# Altium PCB PCI short card universal - 32 BIT.PCBDOC
Units mil, origin at the board's own origin, x right, y up, seen from the top; angles counter-clockwise.
Board outline 6875 x 4200 mil, 10 copper layers (TopLayer, MidLayer1, MidLayer2, MidLayer3, MidLayer4, MidLayer5, MidLayer6, MidLayer7, MidLayer8, BottomLayer); 1 components, 0 nets, 12 pads, 0 vias.
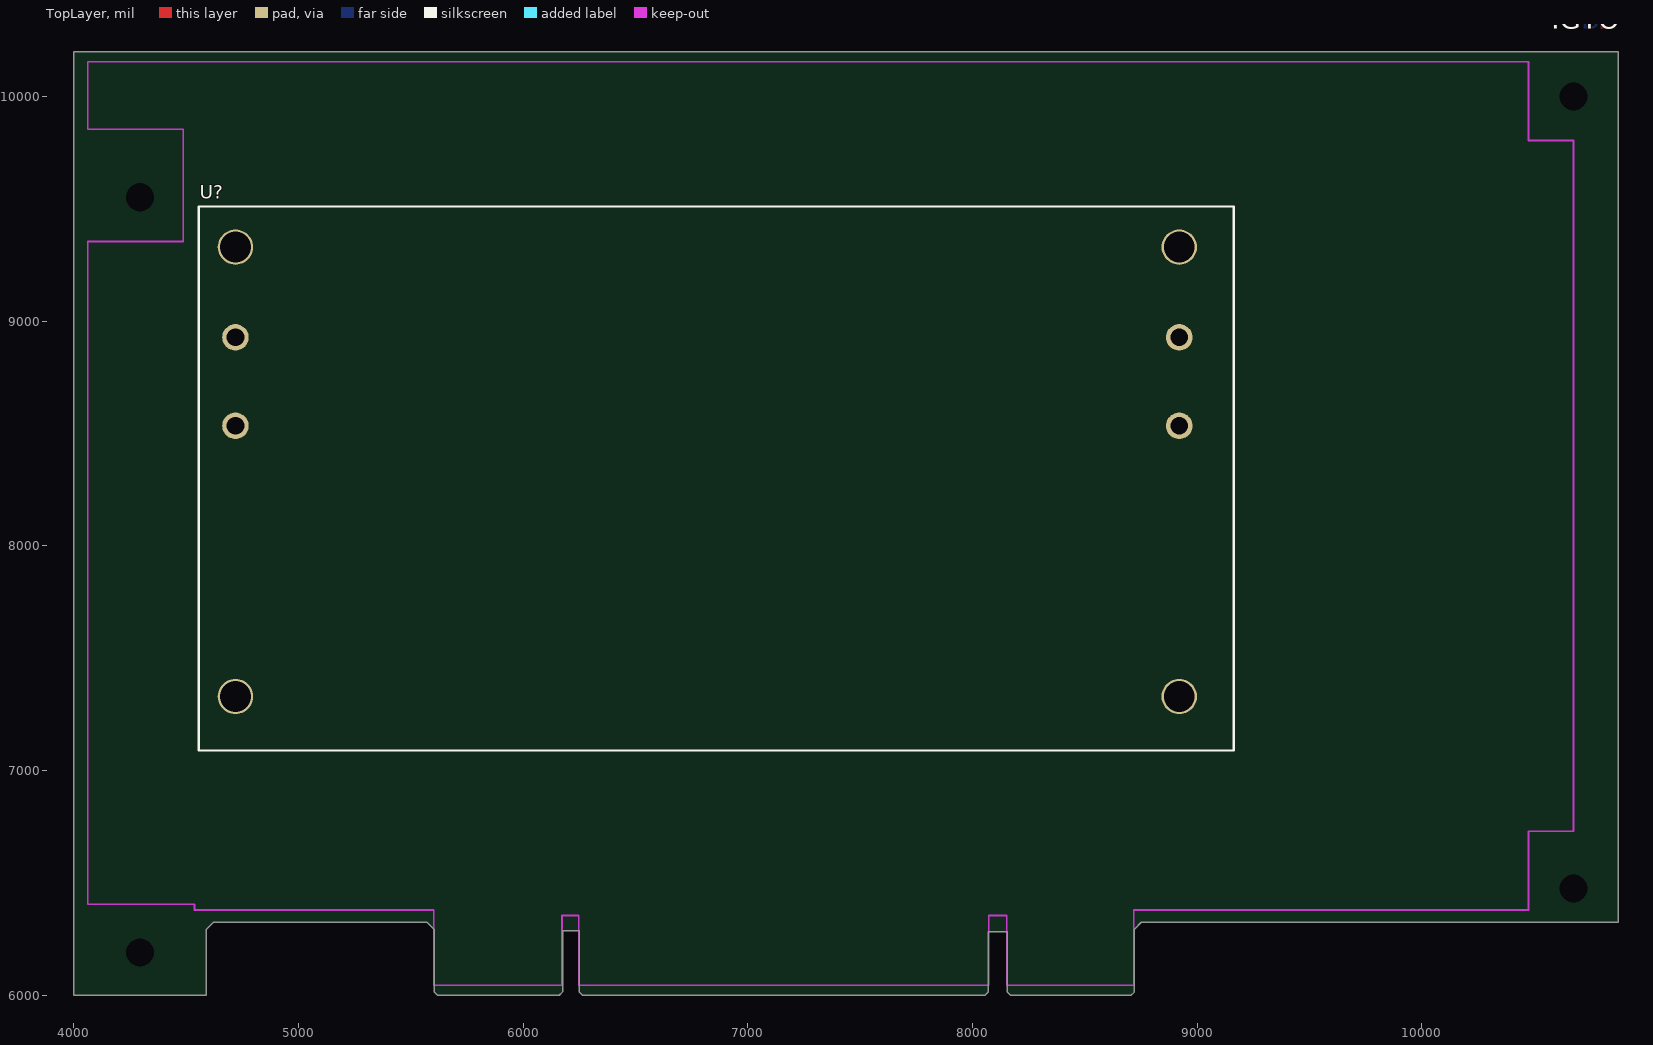
[diagram p0: TopLayer view]
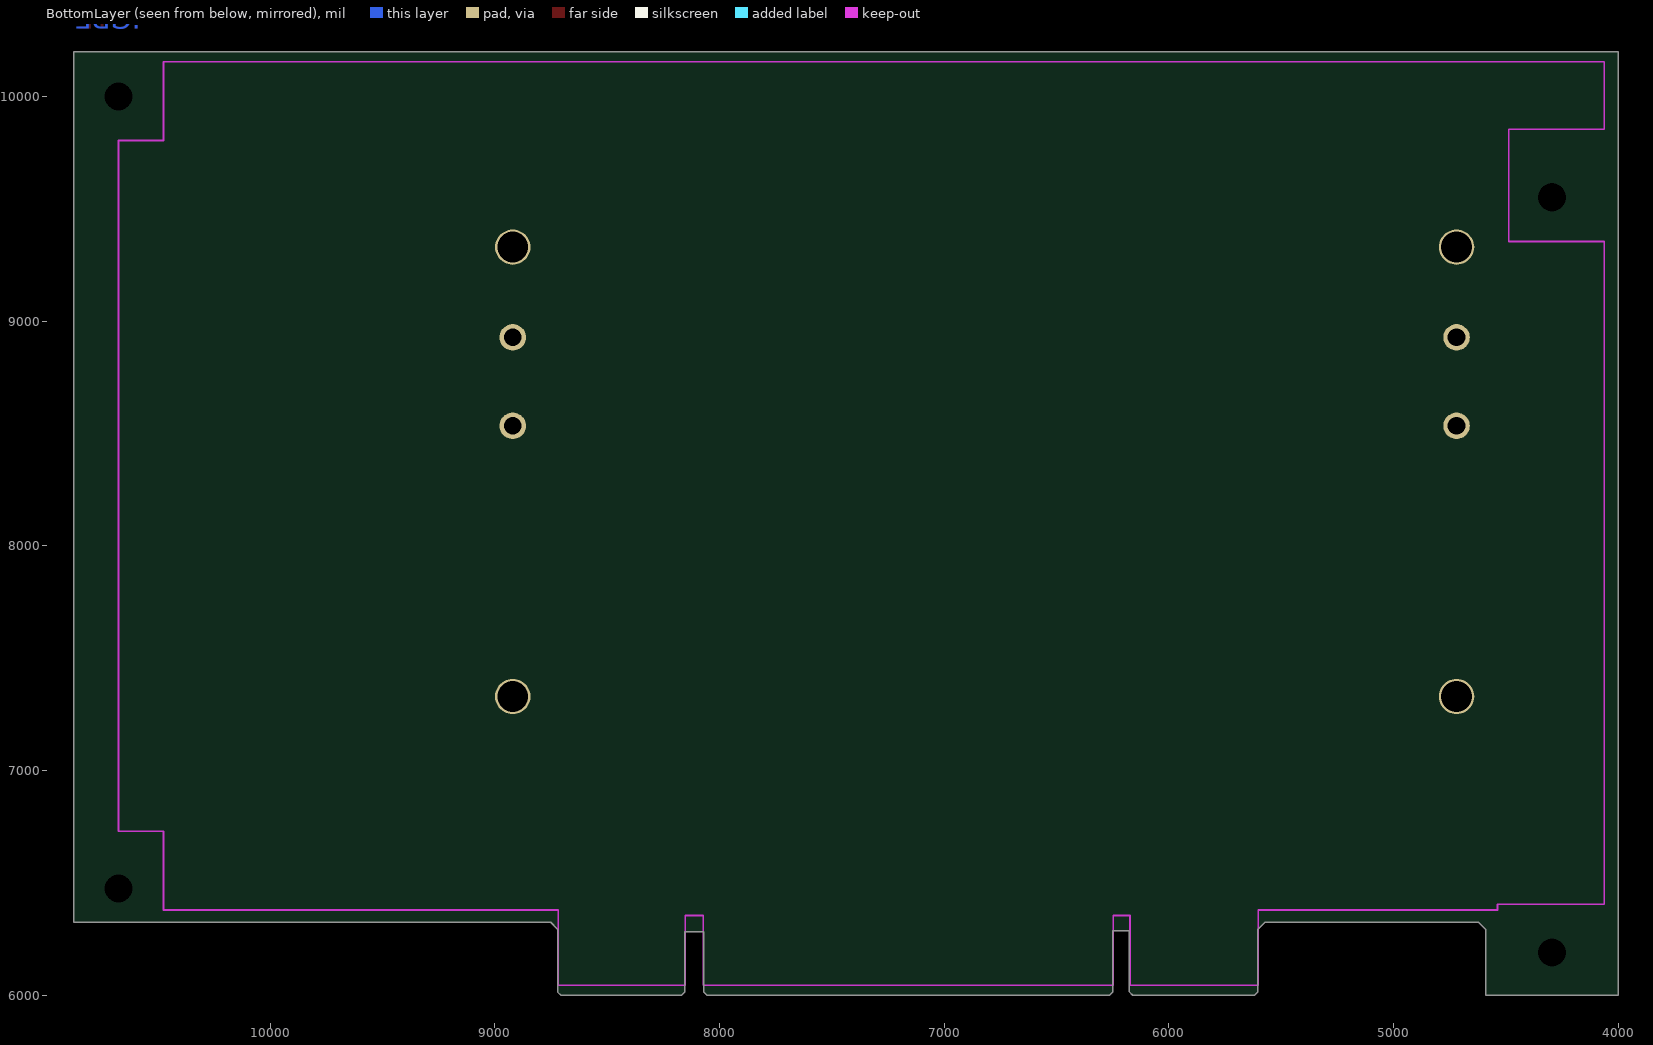
[diagram p1: BottomLayer view, seen from below]
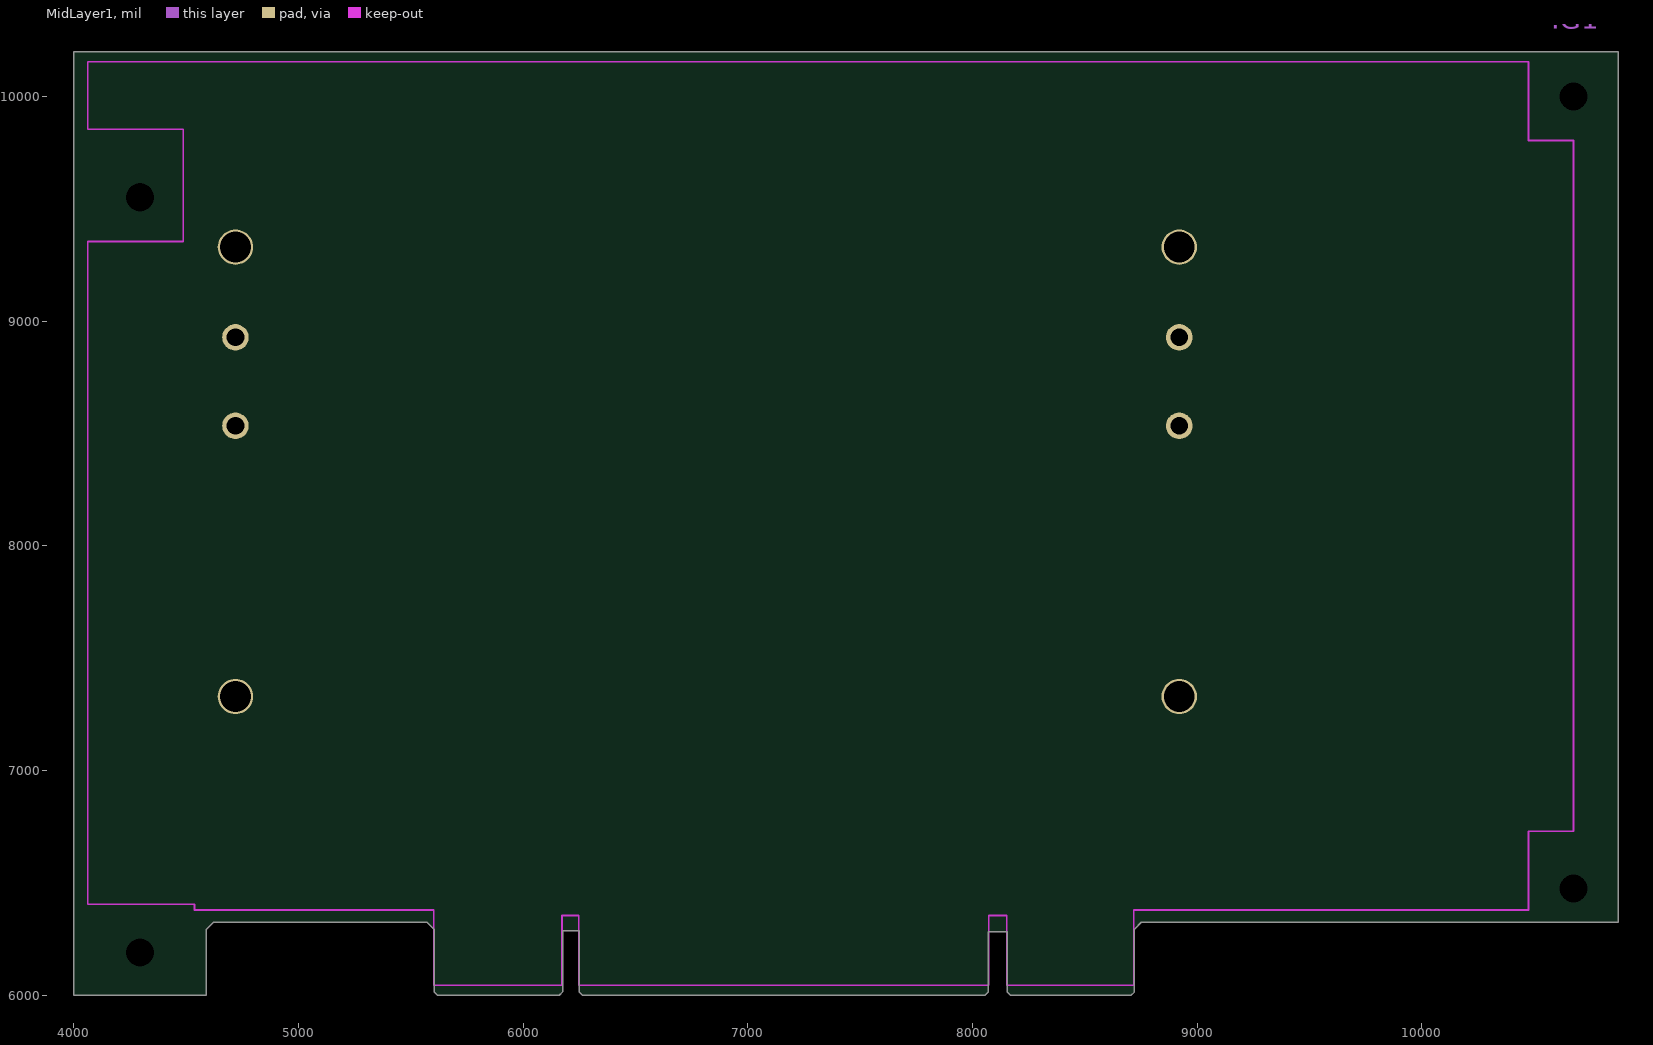
[diagram p2: MidLayer1]
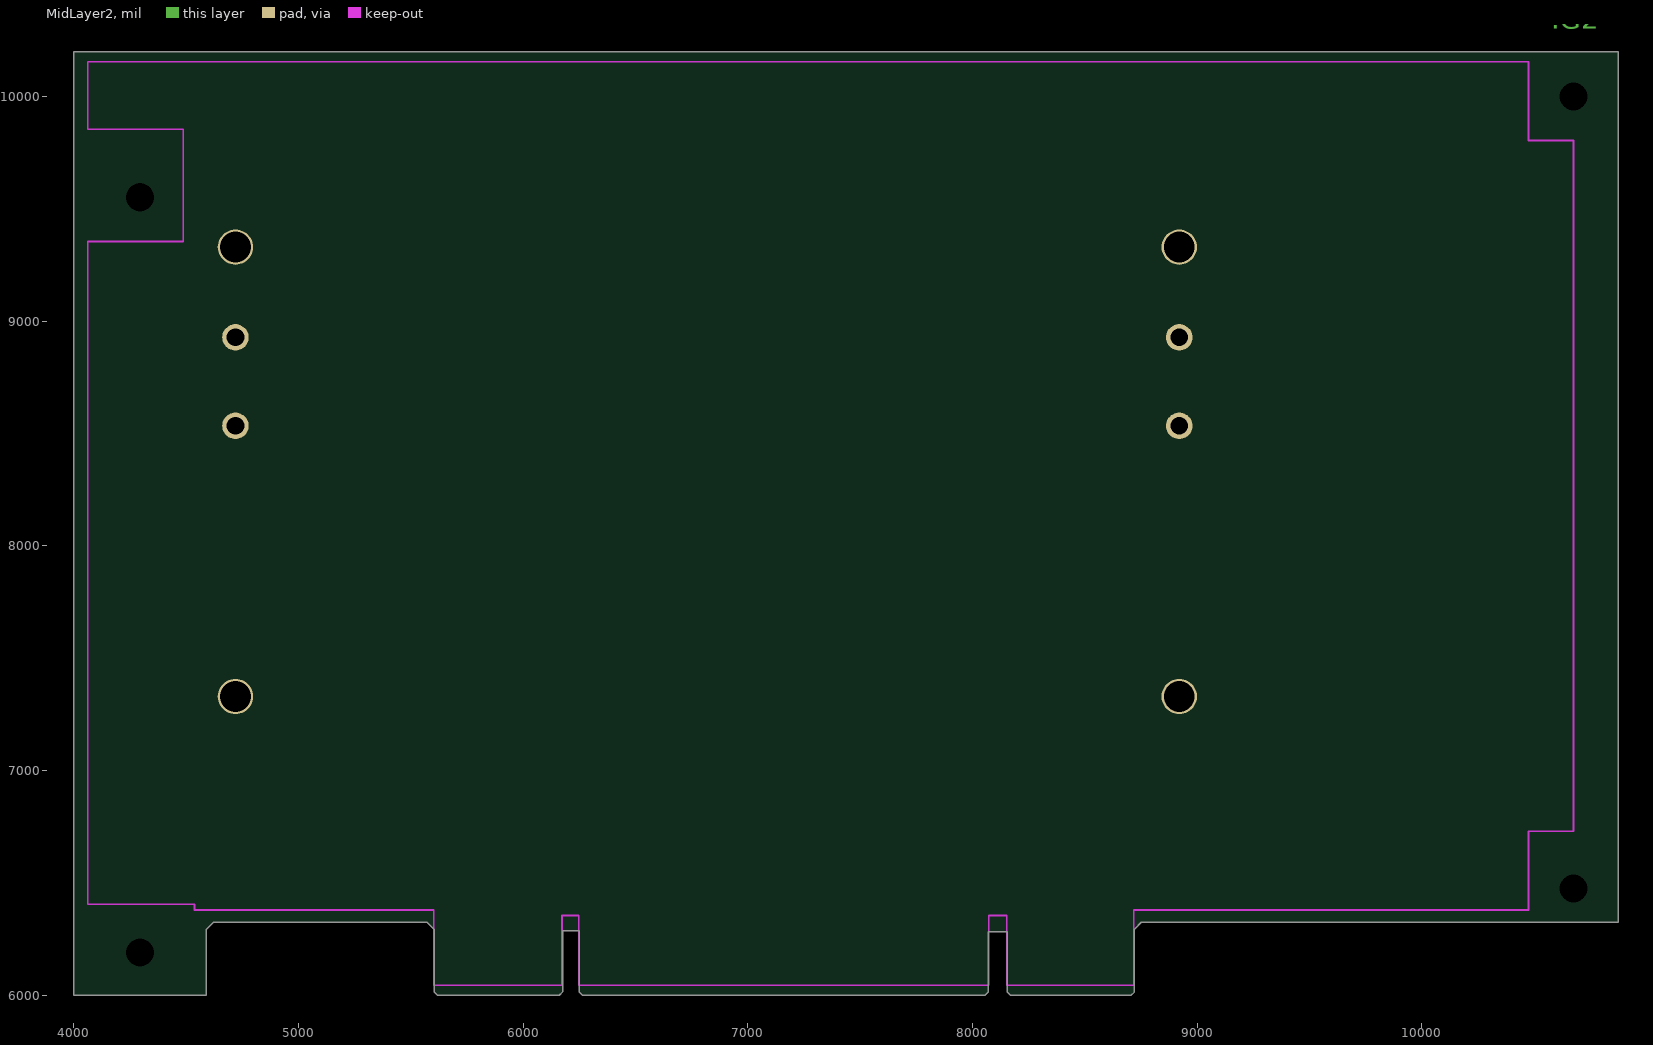
[diagram p3: MidLayer2]
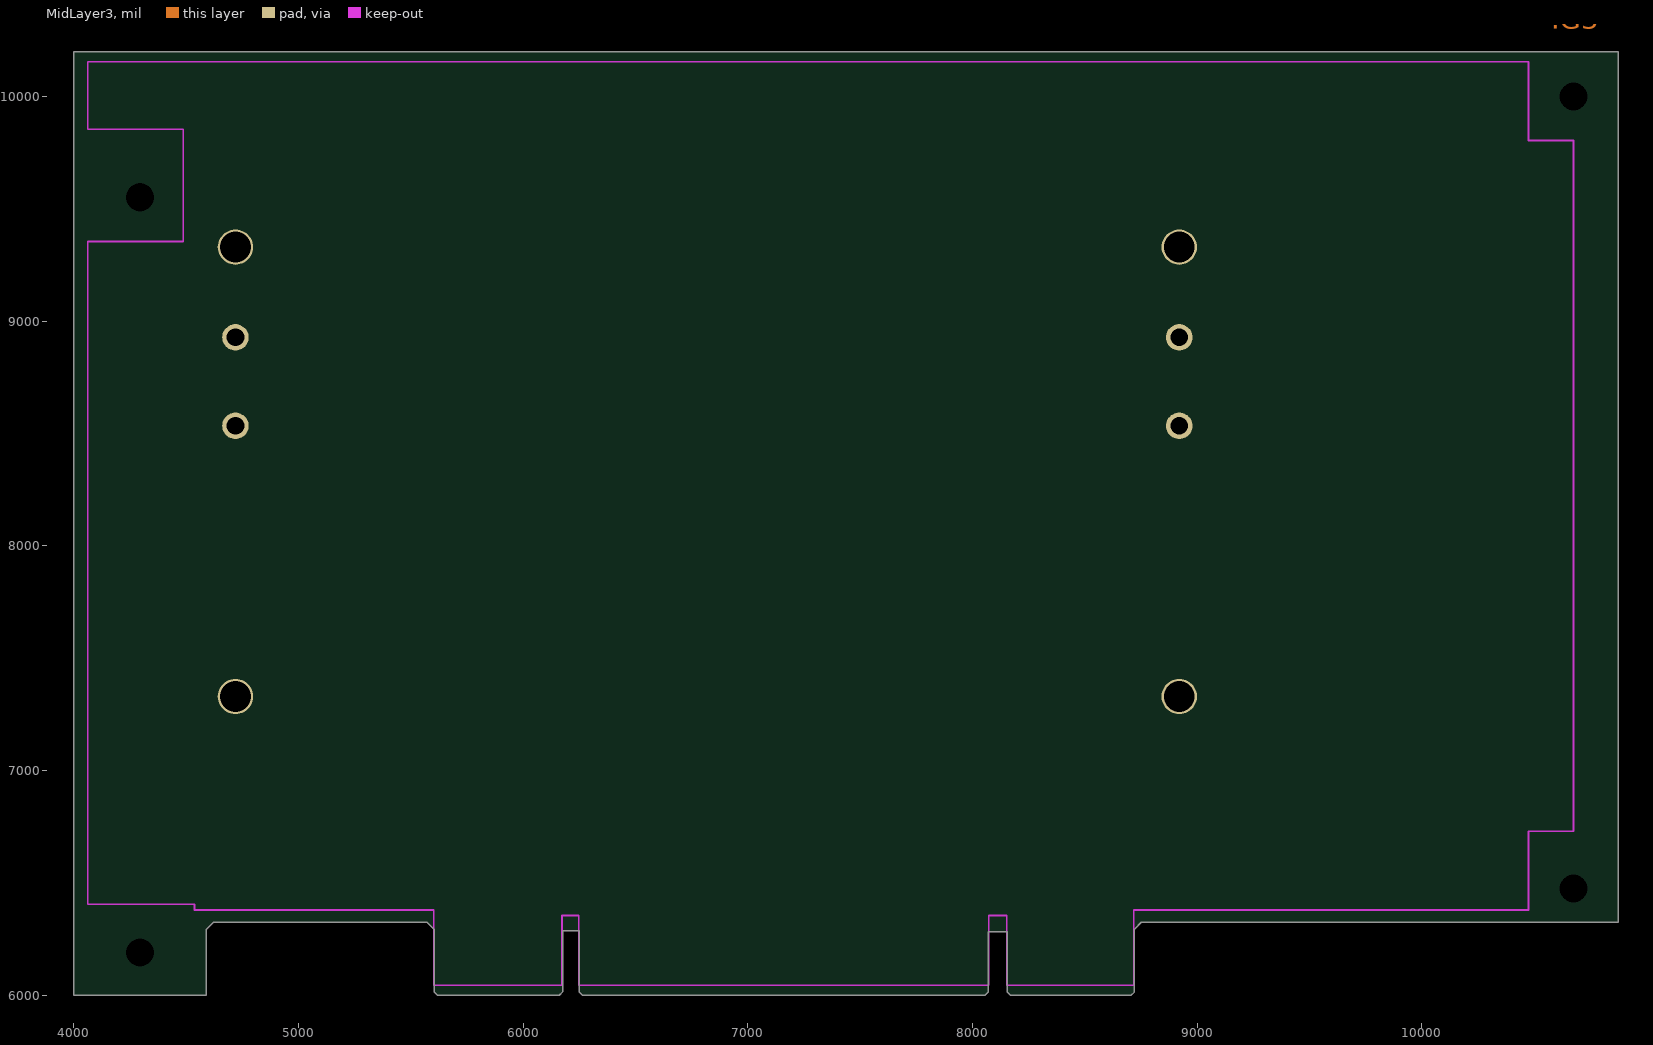
[diagram p4: MidLayer3]
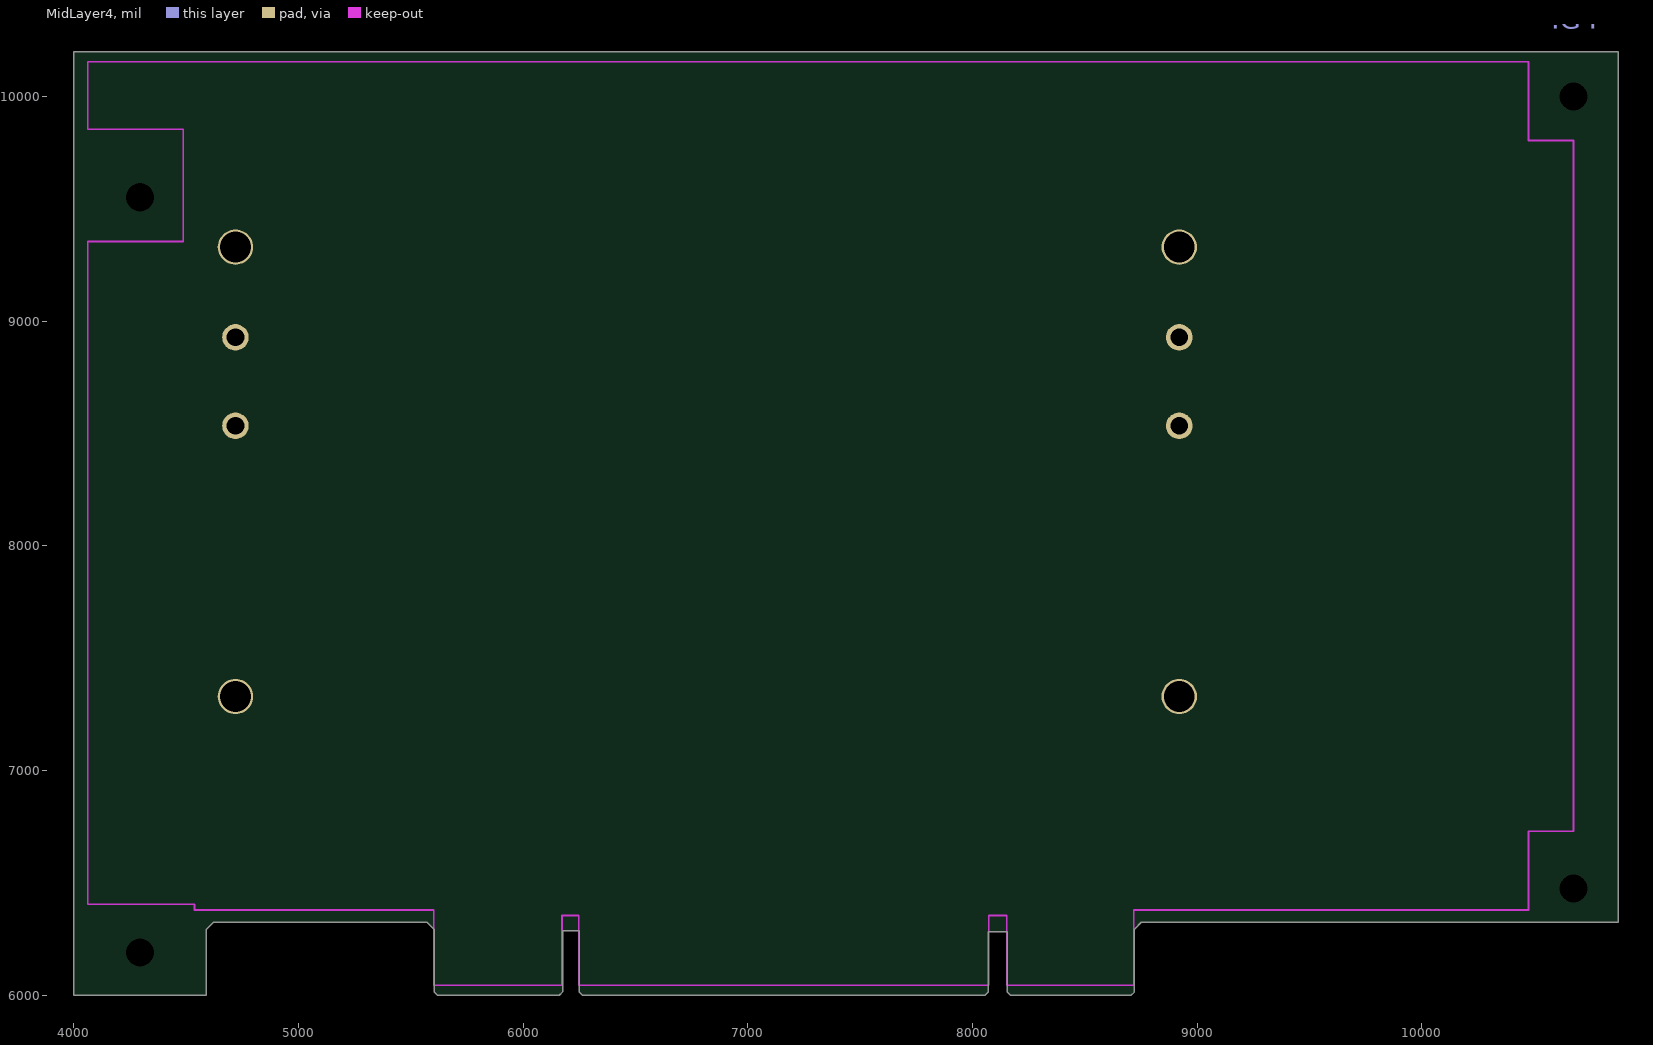
[diagram p5: MidLayer4]
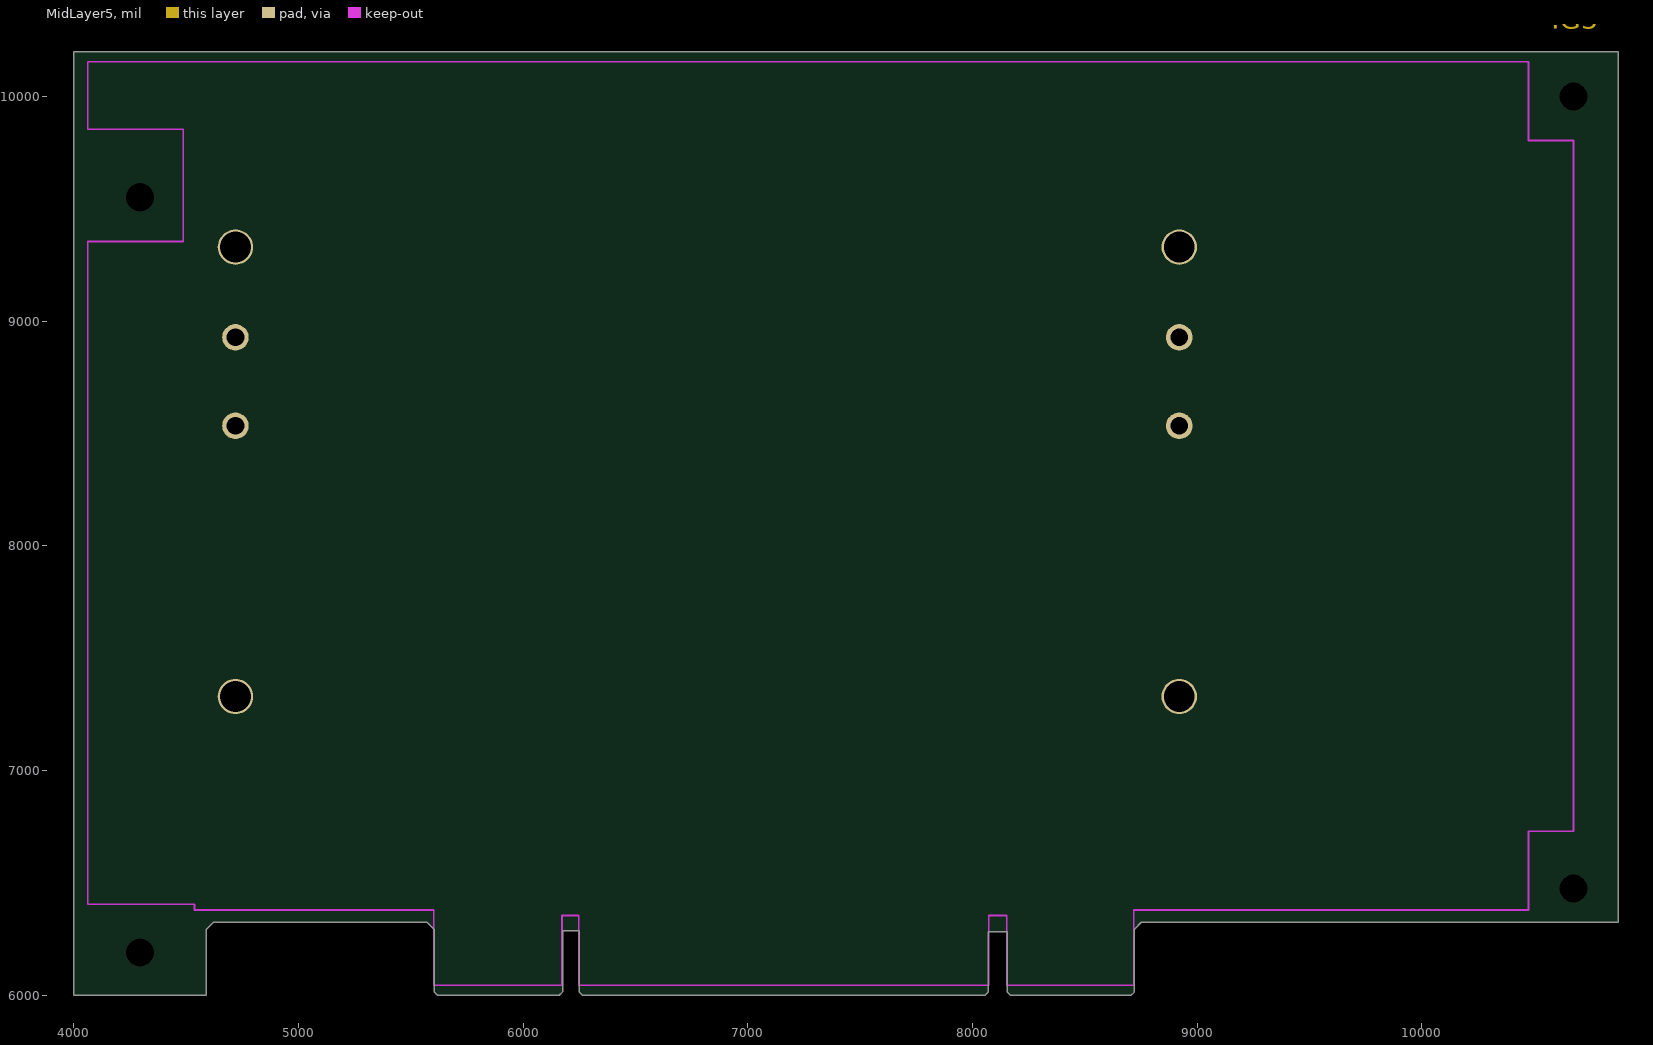
[diagram p6: MidLayer5]
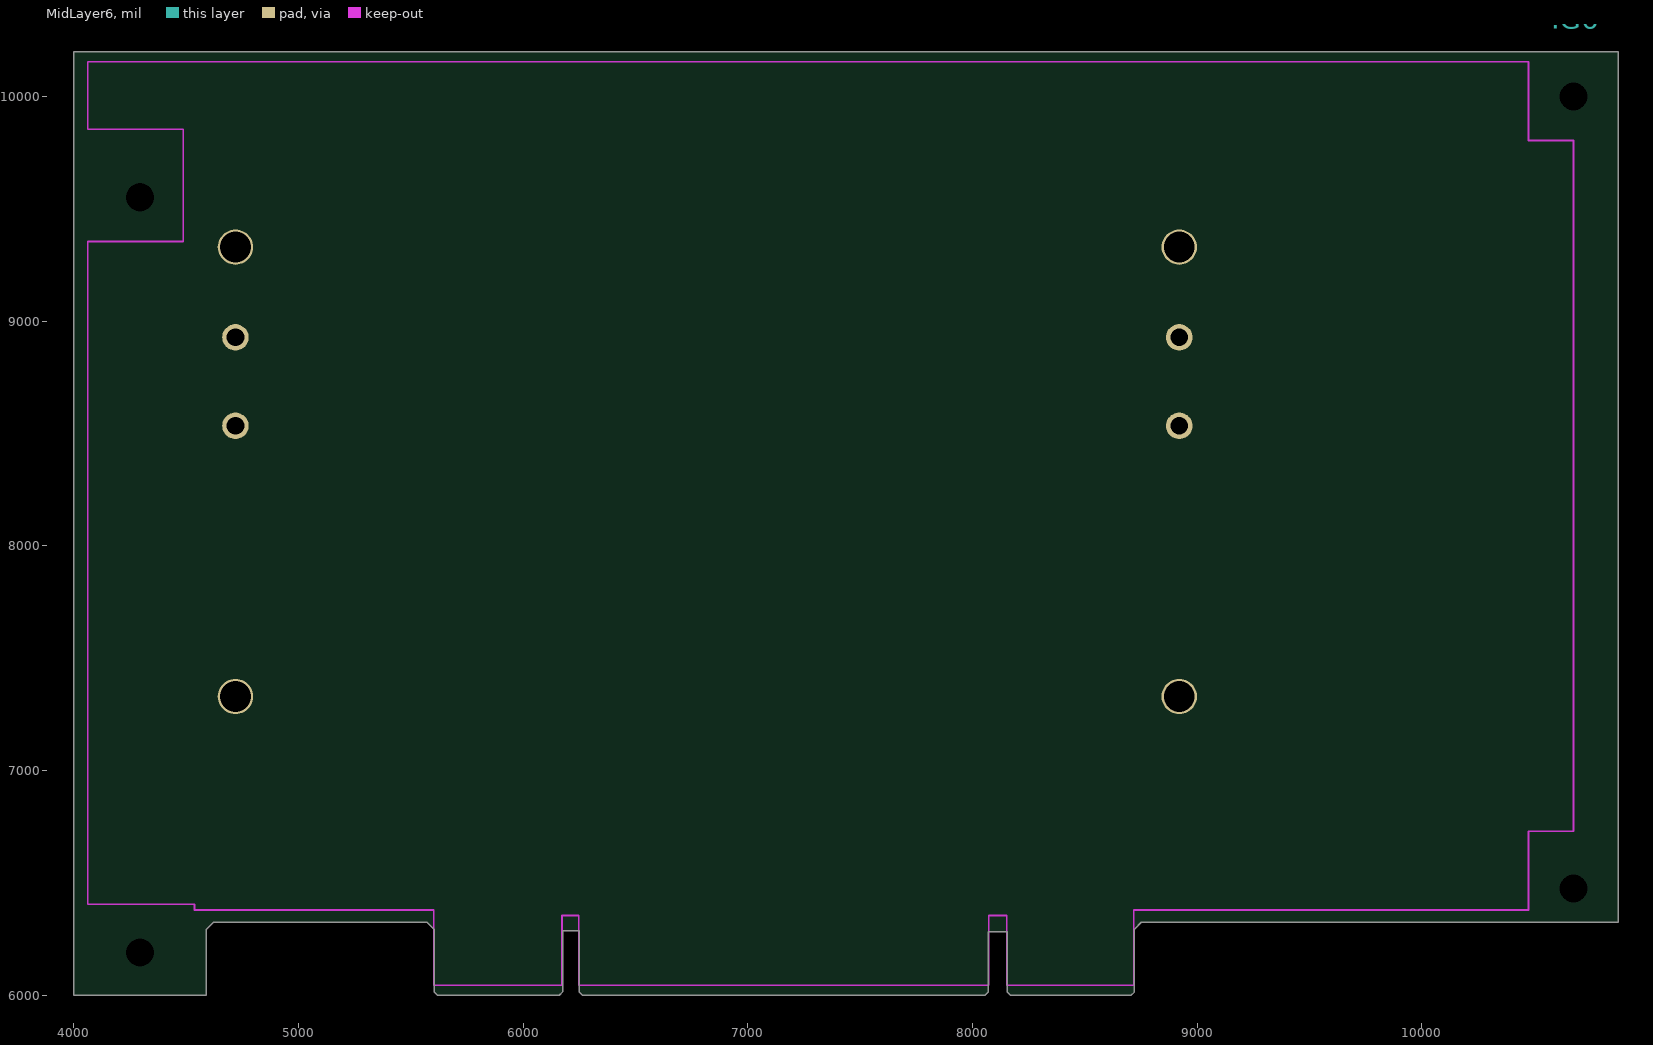
[diagram p7: MidLayer6]
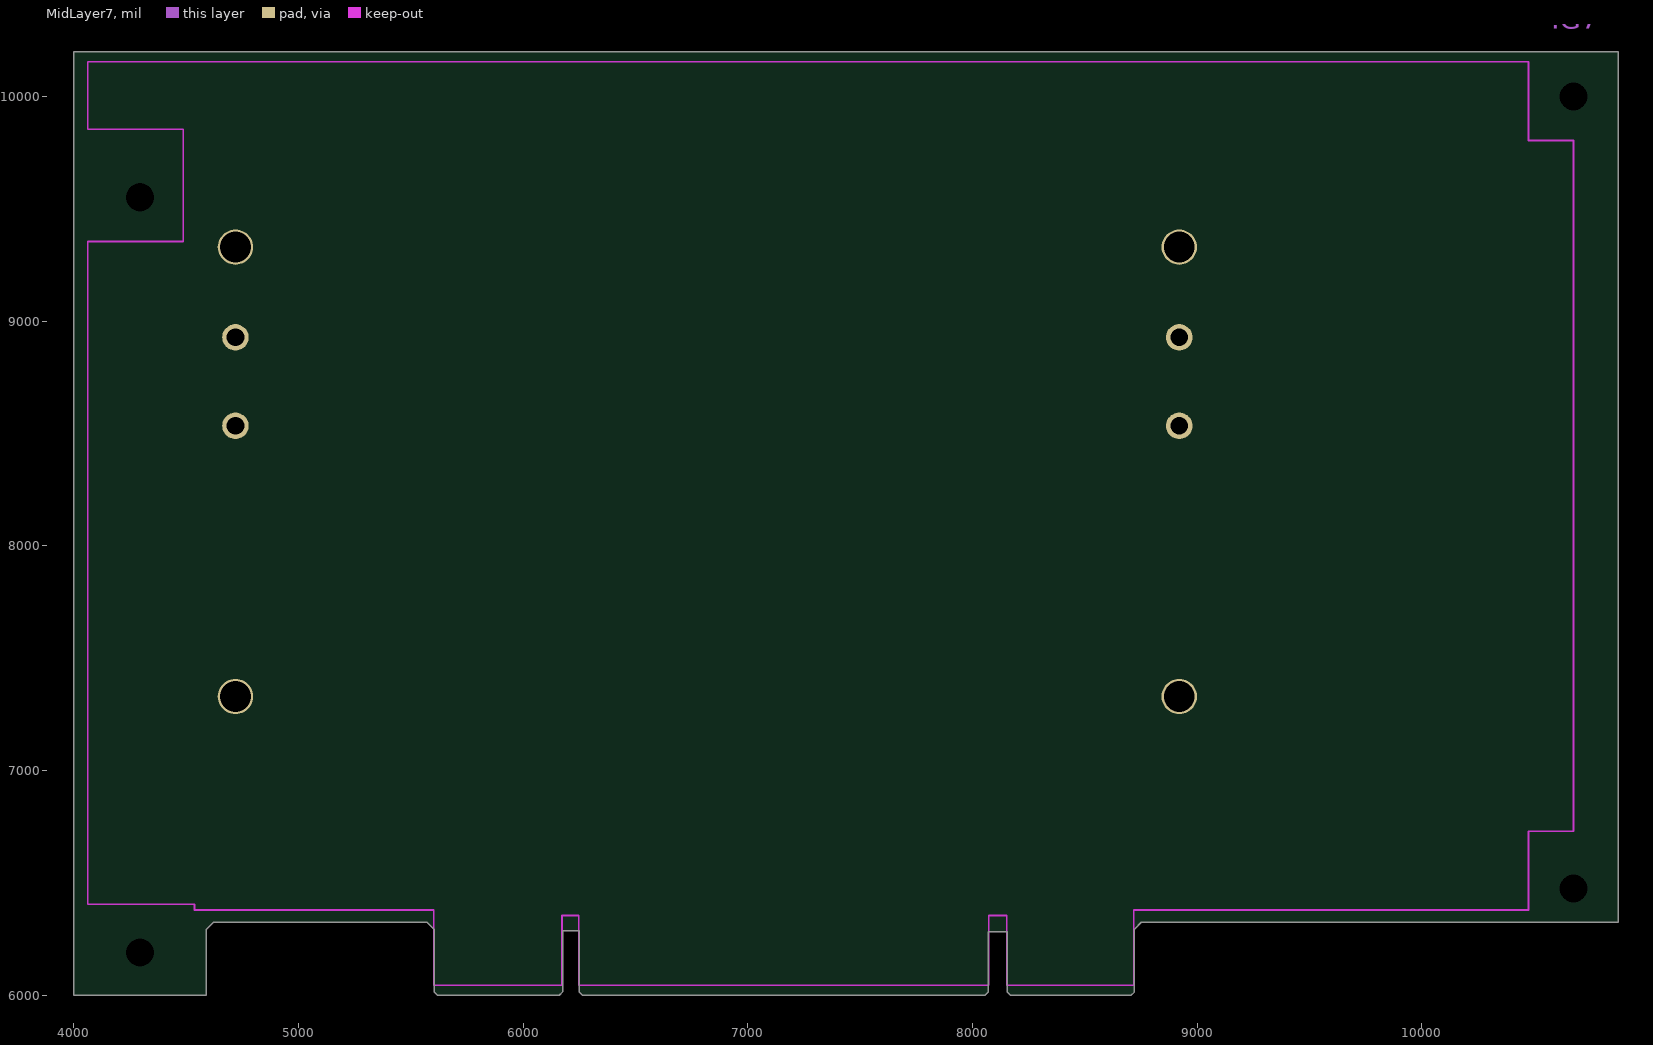
[diagram p8: MidLayer7]
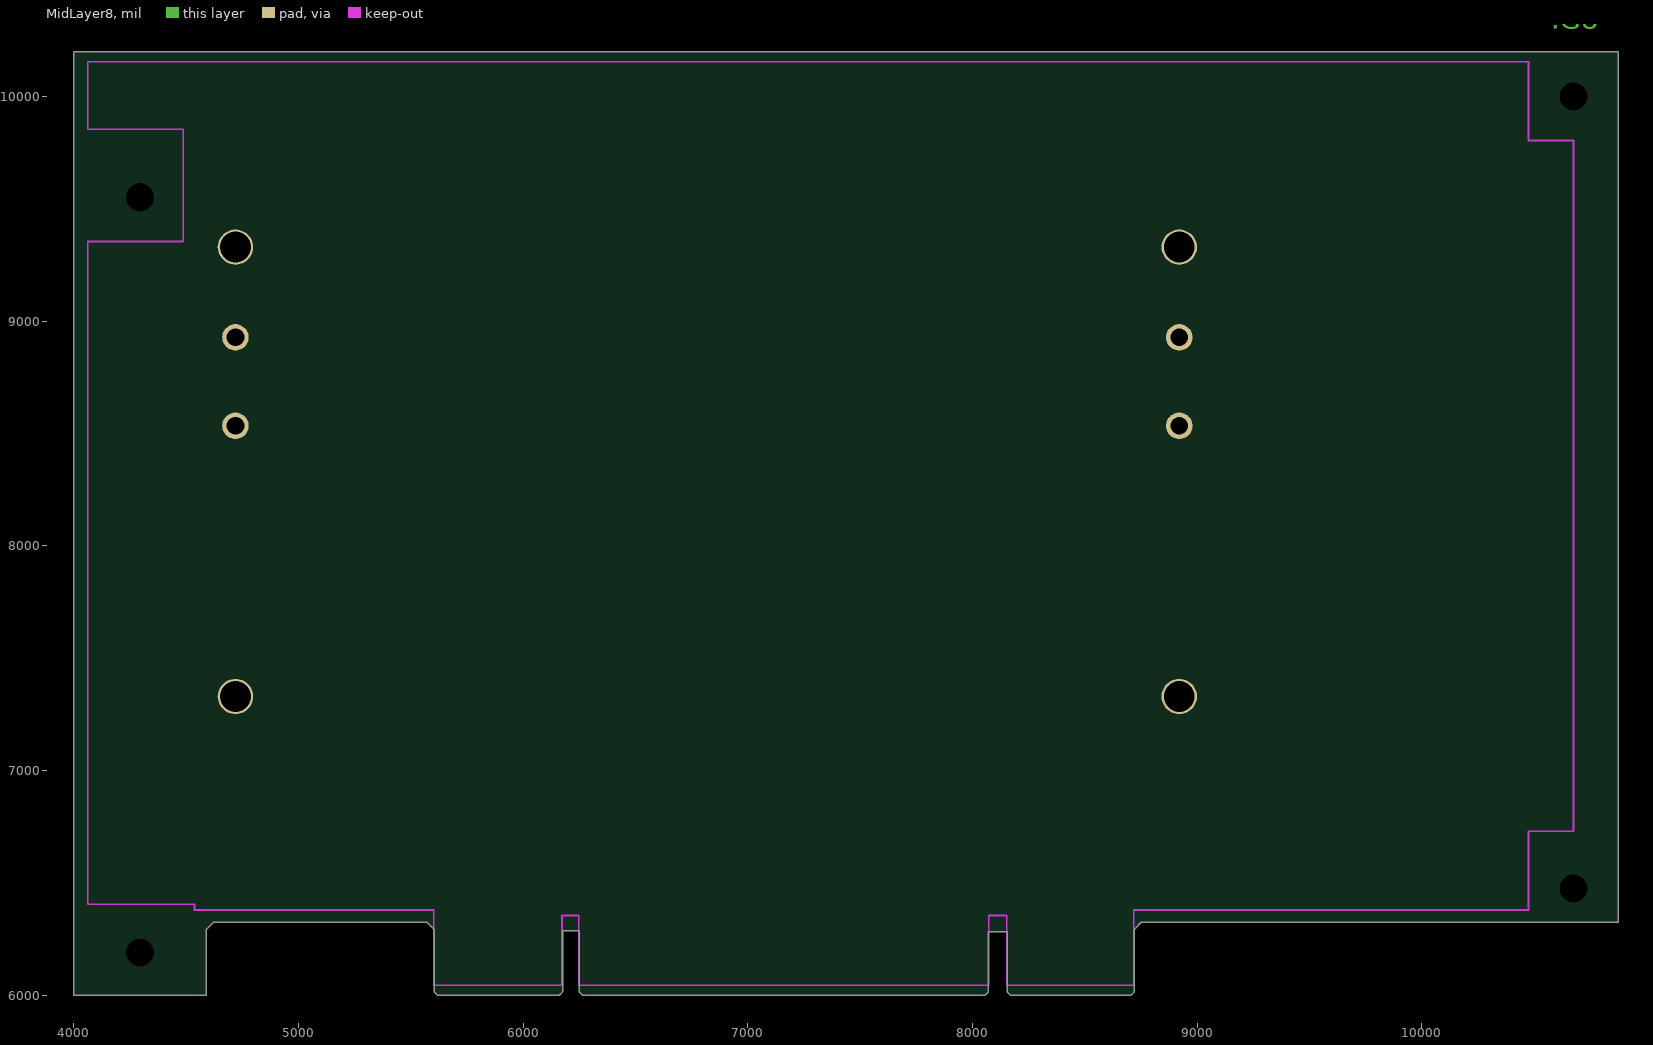
[diagram p9: MidLayer8]

## Layer stack, top to bottom
TopSolder: solder mask 0.4, Solder Resist, Dk 3.5
TopLayer: signal copper 1.4
Dielectric1: core 12.6, FR-4, Dk 4.8
MidLayer1: signal copper 1.4
Dielectric2: prepreg 12.6, FR-4, Dk 4.8
MidLayer2: signal copper 1.4
Dielectric3: core 12.6, FR-4, Dk 4.8
MidLayer3: signal copper 1.4
Dielectric4: prepreg 12.6, FR-4, Dk 4.8
MidLayer4: signal copper 1.4
Dielectric5: core 12.6, FR-4, Dk 4.8
MidLayer5: signal copper 1.4
Dielectric6: prepreg 12.6, FR-4, Dk 4.8
MidLayer6: signal copper 1.4
Dielectric7: core 12.6, FR-4, Dk 4.8
MidLayer7: signal copper 1.4
Dielectric8: prepreg 12.6, FR-4, Dk 4.8
MidLayer8: signal copper 1.4
Dielectric9: core 12.6, FR-4, Dk 4.8
BottomLayer: signal copper 1.4
BottomSolder: solder mask 0.4, Solder Resist, Dk 3.5

## Board outline
4000,6000 4591,6000 4591,6294 4622,6325 5573,6325 5605,6293 5605,6015 5620,6000 6161,6000 6176,6015 6176,6288 6250,6288 6250,6015 6265,6000 8056,6000 8071,6015 8071,6283 8155,6283 8155,6015 8170,6000 8706,6000 8721,6015 8721,6294 8752,6325 10875,6325 10875,10200 4000,10200

## Design rules (kind name [scope] priority, off if disabled: settings)
Clearance [All] p1: gap=10 ignorepadtopadclearanceinfootprint=FALSE except(0: Arc-Hole Track-Hole SMDPad-Hole THPad-Hole Via-Hole Fill-Hole Poly-Hole Region-Hole Text-Hole)
FabricationTestPointUsage TestPointUsage [All] p1: valid=0 allowmultiple=FALSE
FabricationTestpoint Testpoint [All] p1: side=3 testpointundercomponent=TRUE minsize=40 maxsize=100 preferedsize=60 minholesize=20 maxholesize=40 preferedholesize=32 testpointgrid=1 allowsidetop=TRUE allowsidebottom=TRUE usegrid=TRUE gridtolerance=0.01
PasteMaskExpansion PasteMaskExpansion_1 [InComponent('P1')] p1: expansion=-100
PasteMaskExpansion [All] p2: expansion=0
PlaneClearance [All] p1: clearance=10
PolygonConnect [All] p1: connectstyle=Relief reliefconductorwidth=10 reliefentries=4 polygonreliefangle="90 Angle" airgapwidth=10
RoutingVias [All] p1: holewidth=28 width=50 viastyle="Through Hole" minholewidth=28 minwidth=50 maxholewidth=28 maxwidth=50
SilkToSolderMaskClearance SilkscreenOverComponentPads [IsPad] p1: minsilkscreentomaskgap=10 clearancetoexposedcopper=TRUE
SolderMaskExpansion [All] p1: expansion=2
Width [All] p1: maxlimit=10 minlimit=10 preferedwidth=10
25 further rules are at their usual default settings.

## Components (designator, comment, footprint, x,y, rotation, side; value= is the part's Value field where it differs from the comment)
U? "TUNS300F28" TUNS300F28 4720,9330 r0 top

## Footprints (in the part's own frame and the unit in brackets; to place one, negate y for a bottom-side part, rotate by r counter-clockwise, add the part's x,y. Pads: shape width x height; smd on the part's side, far side on the other; paste and mask are expansions set on the pad)
TUNS300F28 [mm] "AC-DC power supply 28V"
  round 3 hole 2: 1(0,-10.2) 2(0,-20.2) 3(106.7,-10.2) 4(106.7,-20.2)
  round 4 hole 3.5: ""(0,-50.8) ""(0,0) ""(106.7,-50.8) ""(106.7,0)
  silkscreen extent -4.15,-56.9 112.85,4.6, body extent -4,-57 113,4.5, height 5

## Part data
U?: Supplier Part Number 1=1776-1801-ND, Supplier 1=Digi-Key

## Free pads (board coordinates)
  round 50 hole 125: 1(10675,6475) 2(10675,10000) 3(4295,9552) 4(4295,6190)

## Nets (pads, with @x,y where several pads share a name; then routed paths per layer and width w, separated by ;. In a path a pad name is that pad's centre, name@x,y a point inside that pad or via, vN(x,y) a via of type N, cw(c..) or ccw(c..) an arc to the next point about the centre after c; other vN are vias at no path point)
pads on no net: U?. U?.1 U?.2 U?.3 U?.4

## Keep-outs
KeepOutLayer:
  lines w8: 4063,6405 4538,6405 4538,6380 5603,6380 5603,6045 6173,6045 6173,6355 6248,6355 6248,6045 8073,6045 8073,6355 8153,6355 8153,6045 8718,6045 8718,6380 10475,6380 10475,6730 10675,6730 10675,9805 10475,9805 10475,10155 4063,10155 4063,9855 4488,9855 4488,9355 4063,9355 4063,6405

## Other copper
TopLayer:
  text ".GTL" at 10577,10303 h90
MidLayer1:
  text ".G1" at 10577,10303 h90
MidLayer2:
  text ".G2" at 10577,10303 h90
MidLayer3:
  text ".G3" at 10577,10303 h90
MidLayer4:
  text ".G4" at 10577,10303 h90
MidLayer5:
  text ".G5" at 10577,10303 h90
MidLayer6:
  text ".G6" at 10577,10303 h90
MidLayer7:
  text ".G7" at 10577,10303 h90
MidLayer8:
  text ".G8" at 10577,10303 h90
BottomLayer:
  text "P/N XXXXXX-XXX REV A" at 5320,10400 h75
  text ".GBL" at 10577,10303 h90

## Silkscreen, mask and mechanical layers (free items; w line width, h text height)
TopOverlay:
  rectangle: 4281,10893 5031,11093
  rectangle: 4281,10603 5031,10803
  lines w10: 5392.59,10995.97 ccw(c5441,11035.5) 5392.71,10995.83
  text "C" at 5496,10998 h60
  text "2002 COMPANY NAME" at 5646,10998 h75
  text "S/N" at 4031,10950.5 h75
  text "BOARD NAME" at 5496,10823 h75
  text "ASSY NO.: XXXXXX" at 5496,10673 h75
  text "REV" at 4031,10653 h75
  text ".GTO" at 10577,10303 h90
TopPaste:
  text ".GTP" at 10577,10303 h90
BottomPaste:
  text ".GBP" at 10577,10303 h90
TopSolder:
  rectangle: 5583,5980 8738,6280
  text ".GTS" at 10577,10303 h90
BottomSolder:
  rectangle: 5583,5980 8738,6280
  text ".GBS" at 10577,10303 h90
Mechanical1:
  lines w20: 5573,6325 5605,6293 5605,6015 5620,6000 6161,6000 6176,6015 6176,6288 6250,6288 6250,6015 6265,6000 8056,6000 8071,6015 8071,6283 8155,6283 8155,6015 8170,6000 8706,6000 8721,6015 8721,6294 8752,6325 10875,6325 10875,10200 4000,10200 4000,6000 4591,6000 4591,6294 4622,6325 5574,6325
Mechanical4:
  circle w10: c5578.67,6044.32 r100
  lines w8: 11740,7320 11915,7320 11915,7025 ; 11840,6820 12240,6820 ; 11840,7020 12190,7020 ; 11915,6520 11915,6815 ; 12002.5,6495 12297.5,6495 ; 12077.5,8045 12385,8045 ; 12302.5,6420 12302.5,6770 ; 12327.5,6420 12327.5,6770 ; 12390,7820 12390,8120 ; 12415,7070 12690,8070 ; 12627.5,6495 12332.5,6495 ; 12959.72,7890.07 12670.77,7995.24 ; 11915,6815 11890,6665 11940,6665 11915,6815 ; 11915,7025 11890,7175 11940,7175 11915,7025 ; 12297.5,6495 12147.5,6470 12147.5,6520 12297.5,6495 ; 12332.5,6495 12482.5,6470 12482.5,6520 12332.5,6495 ; 12385,8045 12235,8020 12235,8070 12385,8045 ; 12670.77,7995.24 12803.17,7920.45 12820.27,7967.43 12670.77,7995.24 ; 11895,6670 11915,6805 11935,6670 11895,6670 ; 11895,7170 11915,7035 11935,7170 11895,7170 ; 11900,6675 11915,6795 11930,6675 11900,6675 ; 11900,7165 11915,7045 11930,7165 11900,7165 ; 11905,6680 11925,6680 11915,6785 11905,6680 ; 11905,7160 11915,7055 11925,7160 11905,7160 ; 11910,6685 11920,6685 11915,6775 11910,6685 ; 11910,7155 11915,7065 11920,7155 11910,7155 ; 12152.5,6475 12152.5,6515 12287.5,6495 12152.5,6475 ; 12157.5,6480 12157.5,6510 12277.5,6495 12157.5,6480 ; 12162.5,6485 12162.5,6505 12267.5,6495 12162.5,6485 ; 12167.5,6490 12257.5,6495 12167.5,6500 12167.5,6490 ; 12240,7020 12240,7782.5 12277.5,7782.5 12290,7720 12352.5,7870 12352.5,7782.5 12390,7782.5 12390,7020 12327.5,6820 12302.5,6820 12240,7020 ; 12240,8025 12240,8065 12375,8045 12240,8025 ; 12245,8030 12245,8060 12365,8045 12245,8030 ; 12250,8035 12355,8045 12250,8055 12250,8035 ; 12255,8040 12345,8045 12255,8050 12255,8040 ; 12342.5,6495 12477.5,6475 12477.5,6515 12342.5,6495 ; 12352.5,6495 12472.5,6480 12472.5,6510 12352.5,6495 ; 12362.5,6495 12467.5,6485 12467.5,6505 12362.5,6495 ; 12372.5,6495 12462.5,6490 12462.5,6500 12372.5,6495 ; 12680.16,7991.82 12800.18,7926.86 12813.86,7964.45 12680.16,7991.82 ; 12689.56,7988.4 12797.19,7933.27 12807.45,7961.46 12689.56,7988.4 ; 12698.96,7984.98 12794.21,7939.67 12801.05,7958.47 12698.96,7984.98 ; 12708.36,7981.56 12791.22,7946.08 12794.64,7955.48 12708.36,7981.56
  lines w10: 5436.67,5991.32 5436.67,6046.32 5456.67,5996.32 5436.67,5991.32 ; 5436.87,6046.16 5438,6100 5458.36,6096.79 5436.87,6046.16
  text ".Pcb_File_Name_No_Path" at 8677,10493 h90
  text ".Printout_Name" at 8677,10303 h90
  text "DETAIL A" at 11940,8320 h150
  text "o" at 12615,8082.5 h48
  text "20" at 12452.5,7982.5 h90
  text "0.071" at 11377.5,7270 h90
  text "+.010" at 11390,7120 h75
  text "-.015" at 11390,6970 h75
  text "0.010" at 12690,6445 h90
  text "+.005" at 12690,6295 h75
  text "-.010" at 12690,6145 h75
  text "SEE DETAIL A" at 4690,6000 h75
DrillDrawing:
  text ".LEGEND" at 11205,9175 h90
  text "Drilling Details." at 11205,9025 h90

## Dimensions
4295,5980 to 4000,6000 on Mechanical4
3980,6190 to 4000,6000 on Mechanical4